# EAGLE board Kord Kontroller PCB 0.1 (EAGLE 9.2.2), part 1 of 2
REV: D
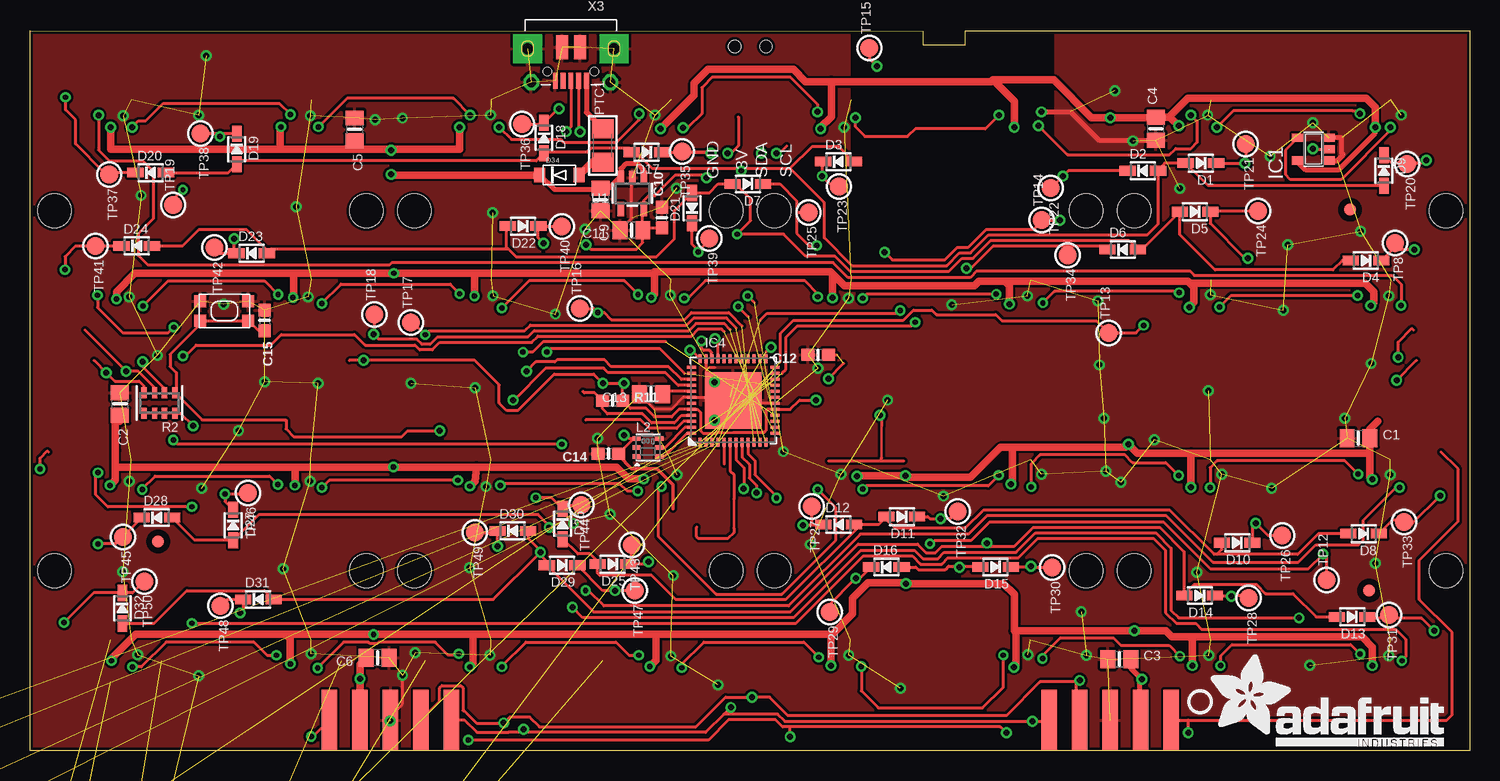
[diagram p0: board, top side]
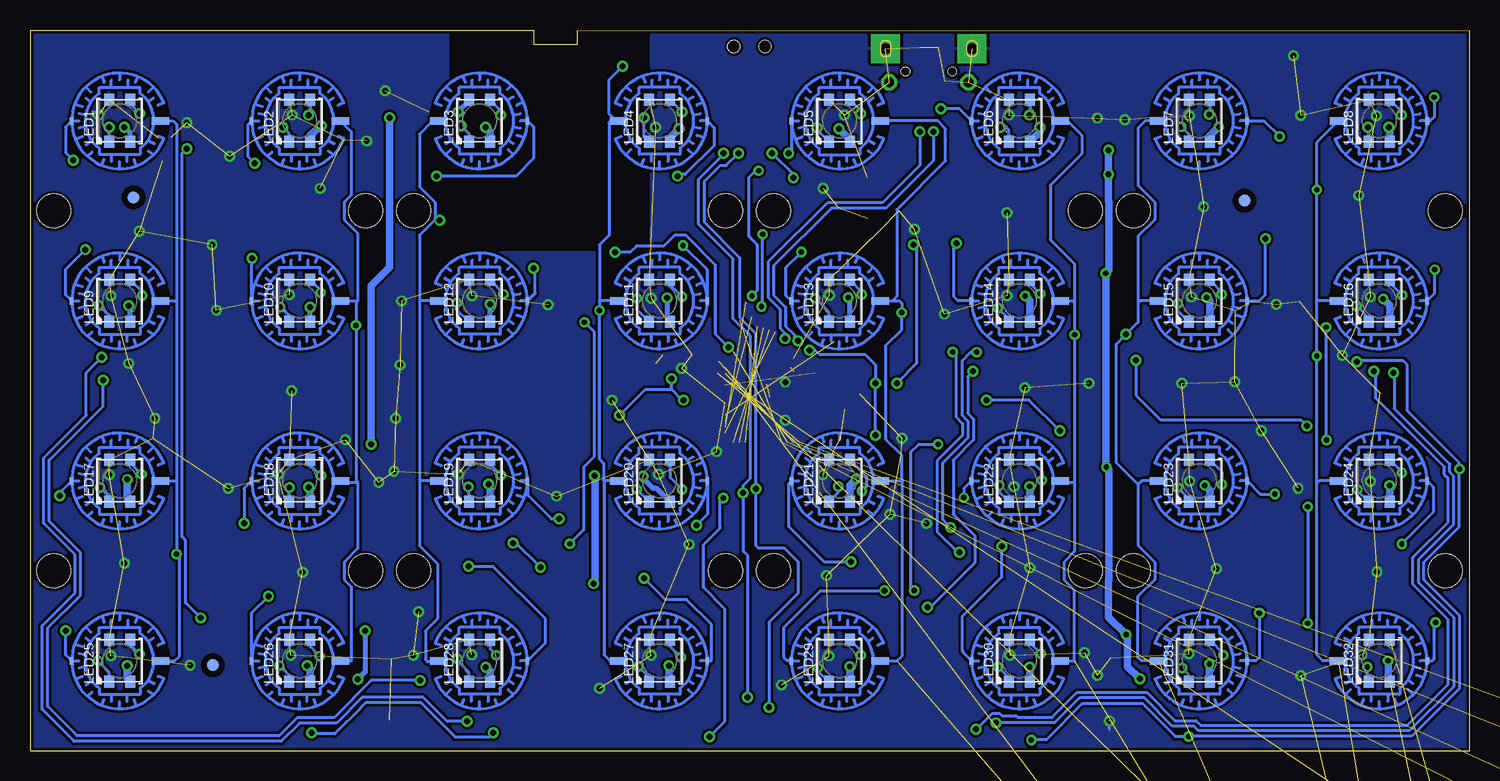
[diagram p1: board, bottom side, seen from below]

Size 120.02 x 60 mm. Coordinates in mm from the lower left corner, seen from the top.
Outline: 120.02,0 0,0 0,60 74.42,59.94 74.42,58.8 77.98,58.8 77.98,60 120.02,60 120.02,0
Copper layers (1*16): Top 0.035mm / dielectric 1.5mm / Bottom 0.035mm
Design rules "adafruit 88 *": minimum track width 8mil, minimum drill 15.5mil, track to track 8mil, track to pad 8mil, pad to pad 8mil, via to via 8mil, smd to smd 8mil, copper to edge 10mil, drill to drill 8mil, minimum pad ring 10mil, minimum via ring 8mil, stop-mask expansion 2mil, vias tented up to drill 20mil, thermal gap 10mil
Net classes: 1 power: width 0.406 mm
Holes 2.8 mm at 118.04,44.97 92.04,44.97 88.04,44.97 62.04,44.97 118.04,14.97 92.04,14.97 88.04,14.97 62.04,14.97 58.04,44.97 32.04,44.97 28.04,44.97 2.04,44.97 58.04,14.97 32.04,14.97 28.04,14.97 2.04,14.97
Holes 1 mm at 61.34,58.67 58.74,58.67
tKeepout: area 0,0 to 6.3,59.9; area 31.7,0 to 38.1,59.9; area 82.5,0 to 88.9,59.9; area 113.7,0 to 120,59.9; area 0,0 to 120,6.3; area 0,53.6 to 31.8,59.9; area 88.2,53.6 to 120,60; area 38,6.3 to 82.5,14.4; area 38.1,34.7 to 82.5,42.3

## Footprints (pad centres in the part's own frame; a part is rotated, then mirrored left to right if it is on the bottom)
0805-NO = smd 1.24 x 1.5: 1 -0.95,0; 2 0.95,0
0603-NO = smd 1.075 x 1: 1 -0.85,0; 2 0.85,0
SOD-323 = smd 1.35 x 0.8: A 1.27,0; C -1.27,0
SOD-123FL = smd 0.91 x 1.22: A 1.637,0; C -1.637,0
FIDUCIAL_1MM = smd 1 x 1: 1 0,0
SOT23-5 = smd 0.69 x 0.99: 1 -0.95,-1.29; 2 0,-1.29; 3 0.95,-1.29; 4 0.95,1.3; 5 -0.95,1.3
TQFN48_7MM = smd 0.25 x 0.75: 1 -2.75,-3.475; 2 -2.25,-3.475; 3 -1.75,-3.475; 4 -1.25,-3.475; 5 -0.75,-3.475; 6 -0.25,-3.475; 7 0.25,-3.475; 8 0.75,-3.475; 9 1.25,-3.475; 10 1.75,-3.475; 11 2.25,-3.475; 12 2.75,-3.475; 25 2.75,3.475; 26 2.25,3.475; 27 1.75,3.475; 28 1.25,3.475; 29 0.75,3.475; 30 0.25,3.475; 31 -0.25,3.475; 32 -0.75,3.475; 33 -1.25,3.475; 34 -1.75,3.475; 35 -2.25,3.475; 36 -2.75,3.475 | smd 0.75 x 0.25: 13 3.475,-2.75; 14 3.475,-2.25; 15 3.475,-1.75; 16 3.475,-1.25; 17 3.475,-0.75; 18 3.475,-0.25; 19 3.475,0.25; 20 3.475,0.75; 21 3.475,1.25; 22 3.475,1.75; 23 3.475,2.25; 24 3.475,2.75; 37 -3.475,2.75; 38 -3.475,2.25; 39 -3.475,1.75; 40 -3.475,1.25; 41 -3.475,0.75; 42 -3.475,0.25; 43 -3.475,-0.25; 44 -3.475,-0.75; 45 -3.475,-1.25; 46 -3.475,-1.75; 47 -3.475,-2.25; 48 -3.475,-2.75 | smd 4.7 x 4.7: THERMAL 0,0
DIN5-RA-PTH = drill 1.4 pad 2.286: 1 7.3,12.5; 2 0,12.5; 3 -7.3,12.5; 4 5,15; 5 -5,15; 6 -5,2.8; 7 5,2.8
5P_EDGECONNECT = smd 1.27 x 5.08: 1 -5.08,0; 2 -2.54,0; 3 0,0; 4 2.54,0; 5 5.08,0
APA102_2020 = smd 0.7 x 0.35: 1 -0.95,-0.75; 2 -0.95,0; 3 -0.95,0.75; 4 0.95,0.75; 5 0.95,0; 6 0.95,-0.75
LED3535 = smd 1 x 0.85: 1 -1.75,0.875; 2 -1.75,-0.875; 3 1.75,-0.875; 4 1.75,0.875
1206 = smd 1.6 x 1.8: 1 -1.4,0; 2 1.4,0
RESPACK_4X0603 = smd 0.45 x 0.9: 1 -1.3,-0.85; 2 -0.4,-0.85; 3 0.4,-0.85; 4 1.3,-0.85; 5 1.3,0.85; 6 0.4,0.85; 7 -0.4,0.85; 8 -1.3,0.85
KMR2 = smd 1 x 1: 1 2,0.8; 2 2,-0.8; 3 -2,0.8; 4 -2,-0.8
TESTPOINT_ROUND_1.5MM = smd 1.5 x 1.5: P$1 0,0
SOT23-5' = smd 0.55 x 1.2: 1 -0.95,-1.3; 2 0,-1.3; 3 0.95,-1.3; 4 0.95,1.3; 5 -0.95,1.3
ELAST_PAD_SQUARE_10MM_4X4WIDE = smd 1.45 x 0.635: P$1 -3.4,0 | smd 0.305 x 0.61: P$2 4,0
4UCONN_20329_NARROW = smd 1 x 2: BASE@1 -0.75,-2; BASE@2 0.75,-2 | smd 0.4 x 1.35: D+ 0,0.775; D- -0.65,0.775; GND 1.3,0.775; ID 0.65,0.775; VBUS -1.3,0.775 | drill 0.8 pad 1.27 octagon: SPRT@1 -3.3,0.9; SPRT@2 3.3,0.9 | drill 0.9 pad 2.413 square: SPRT@3 -3.6,-1.9; SPRT@4 3.6,-1.9 | hole 0.7: -1.95,0; 1.95,0

## Placement (x,y rotation side)
C1  10u  [0805-NO]  110.74,26.04 0 top
C2  10u  [0805-NO]  7.49,28.88 270 top
C3  10u  [0805-NO]  90.81,7.63 0 top
C4  10u  [0805-NO]  93.85,51.82 90 top
C5  10u  [0805-NO]  27.05,51.77 270 top
C6  10u  [0805-NO]  28.98,7.72 180 top
C9  10µF  [0805-NO]  47.56,45.92 270 top
C10  1uF  [0603-NO]  52.67,44.41 90 top
C11  10µF  [0805-NO]  50.13,43.37 180 top
C12  1uF  [0603-NO]  65.7,32.97 180 top
C13  10uF  [0805-NO]  51.78,29.71 180 top
C14  1uF  [0603-NO]  48.21,24.75 180 top
C15  0.1uF  [0603-NO]  19.55,35.84 270 top
D1  1N4148  [SOD-323]  97.61,48.95 180 top
D2  1N4148  [SOD-323]  92.77,48.32 0 top
D3  1N4148  [SOD-323]  67.39,49.07 0 top
D4  1N4148  [SOD-323]  111.37,40.84 180 top
D5  1N4148  [SOD-323]  97.11,44.9 180 top
D6  1N4148  [SOD-323]  91.08,41.75 0 top
D7  1N4148  [SOD-323]  59.84,47.21 180 top
D8  1N4148  [SOD-323]  111.17,18.08 180 top
D9  1N4148  [SOD-323]  112.86,48.33 270 top
D10  1N4148  [SOD-323]  100.63,17.32 180 top
D11  1N4148  [SOD-323]  72.68,19.49 180 top
D12  1N4148  [SOD-323]  67.41,18.83 0 top
D13  1N4148  [SOD-323]  110.21,11.14 180 top
D14  1N4148  [SOD-323]  97.51,12.91 180 top
D15  1N4148  [SOD-323]  80.49,15.3 180 top
D16  1N4148  [SOD-323]  71.39,15.29 0 top
D17  1N4148  [SOD-323]  51.41,49.86 180 top
D18  1N4148  [SOD-323]  42.84,51.05 270 top
D19  1N4148  [SOD-323]  17.23,50.12 270 top
D20  1N4148  [SOD-323]  10.06,48.16 0 top
D21  1N4148  [SOD-323]  55.19,45.2 90 top
D22  1N4148  [SOD-323]  41.1,43.7 180 top
D23  1N4148  [SOD-323]  18.48,41.44 0 top
D24  1N4148  [SOD-323]  8.9,42.06 0 top
D25  1N4148  [SOD-323]  48.57,15.53 180 top
D26  1N4148  [SOD-323]  44.39,18.89 270 top
D27  1N4148  [SOD-323]  16.94,18.8 270 top
D28  1N4148  [SOD-323]  10.57,19.41 0 top
D29  1N4148  [SOD-323]  44.36,15.45 180 top
D30  1N4148  [SOD-323]  40.24,18.31 0 top
D31  1N4148  [SOD-323]  19.03,12.59 0 top
D32  1N4148  [SOD-323]  7.7,11.86 270 top
D33  1N4148  [SOD-323]  -27.9,-20.1 0 top  (outside the outline)
D34  MBR120  [SOD-123FL]  44.13,47.96 0 top
D35  1N4148  [SOD-323]  -23.9,-20.1 0 top  (outside the outline)
D36  1N4148  [SOD-323]  -19.9,-20.1 0 top  (outside the outline)
D37  1N4148  [SOD-323]  -15.9,-20.1 0 top  (outside the outline)
D38  1N4148  [SOD-323]  -27.9,-43.8 0 top  (outside the outline)
D39  1N4148  [SOD-323]  -23.9,-43.8 0 top  (outside the outline)
D40  1N4148  [SOD-323]  -19.9,-43.8 0 top  (outside the outline)
D41  1N4148  [SOD-323]  -15.9,-43.8 0 top  (outside the outline)
D42  1N4148  [SOD-323]  -27.9,-69.8 0 top  (outside the outline)
D43  1N4148  [SOD-323]  -23.9,-69.8 0 top  (outside the outline)
D44  1N4148  [SOD-323]  -19.9,-69.8 0 top  (outside the outline)
D45  1N4148  [SOD-323]  -15.9,-69.8 0 top  (outside the outline)
D46  1N4148  [SOD-323]  -27.9,-104.2 0 top  (outside the outline)
D47  1N4148  [SOD-323]  -23.9,-104.2 0 top  (outside the outline)
D48  1N4148  [SOD-323]  -19.9,-104.2 0 top  (outside the outline)
D49  1N4148  [SOD-323]  -15.9,-104.2 0 top  (outside the outline)
D50  1N4148  [SOD-323]  -11.9,-104.2 0 top  (outside the outline)
D51  1N4148  [SOD-323]  -7.9,-104.2 0 top  (outside the outline)
D52  1N4148  [SOD-323]  -3.9,-104.2 0 top  (outside the outline)
D53  1N4148  [SOD-323]  0.1,-104.2 0 top  (outside the outline)
D54  1N4148  [SOD-323]  -27.9,-108.7 0 top  (outside the outline)
D55  1N4148  [SOD-323]  -23.9,-108.7 0 top  (outside the outline)
D56  1N4148  [SOD-323]  -19.9,-108.7 0 top  (outside the outline)
D57  1N4148  [SOD-323]  -15.9,-108.7 0 top  (outside the outline)
FID1  FIDUCIAL_1MM  [FIDUCIAL_1MM]  10.68,17.43 0 top
FID2  FIDUCIAL_1MM  [FIDUCIAL_1MM]  111.63,13.34 0 top
FID3  FIDUCIAL_1MM  [FIDUCIAL_1MM]  110.04,45.08 0 top
FID4  FIDUCIAL_1MM  [FIDUCIAL_1MM]  111.38,46.1 0 bottom
FID5  FIDUCIAL_1MM  [FIDUCIAL_1MM]  104.78,7.11 0 bottom
FID6  FIDUCIAL_1MM  [FIDUCIAL_1MM]  18.77,45.82 0 bottom
IC1  74HCT1G125DBV  [SOT23-5]  107,50.11 90 top
IC4  ATSAMD51G_TQFN48  [TQFN48_7MM]  58.62,29.17 0 top
J1  DIN5  [DIN5-RA-PTH]  -19.3,4.4 0 top  (outside the outline)
JP3  [5P_EDGECONNECT]  30.04,2.54 0 top
JP4  [5P_EDGECONNECT]  90.04,2.54 180 top
L2  AP102-2020  [APA102_2020]  51.51,25.25 0 top
LED1  WS2812B3535  [LED3535]  112.54,52.47 90 bottom
LED2  WS2812B3535  [LED3535]  97.54,52.47 90 bottom
LED3  WS2812B3535  [LED3535]  82.54,52.47 90 bottom
LED4  WS2812B3535  [LED3535]  67.54,52.47 90 bottom
LED5  WS2812B3535  [LED3535]  52.54,52.47 90 bottom
LED6  WS2812B3535  [LED3535]  37.54,52.47 90 bottom
LED7  WS2812B3535  [LED3535]  22.54,52.47 90 bottom
LED8  WS2812B3535  [LED3535]  7.54,52.47 90 bottom
LED9  WS2812B3535  [LED3535]  112.54,37.47 90 bottom
LED10  WS2812B3535  [LED3535]  97.54,37.47 90 bottom
LED11  WS2812B3535  [LED3535]  67.54,37.47 90 bottom
LED12  WS2812B3535  [LED3535]  82.54,37.47 90 bottom
LED13  WS2812B3535  [LED3535]  52.54,37.47 90 bottom
LED14  WS2812B3535  [LED3535]  37.54,37.47 90 bottom
LED15  WS2812B3535  [LED3535]  22.54,37.47 90 bottom
LED16  WS2812B3535  [LED3535]  7.54,37.47 90 bottom
LED17  WS2812B3535  [LED3535]  112.54,22.47 90 bottom
LED18  WS2812B3535  [LED3535]  97.54,22.48 90 bottom
LED19  WS2812B3535  [LED3535]  82.55,22.48 90 bottom
LED20  WS2812B3535  [LED3535]  67.54,22.47 90 bottom
LED21  WS2812B3535  [LED3535]  52.54,22.47 90 bottom
LED22  WS2812B3535  [LED3535]  37.53,22.47 90 bottom
LED23  WS2812B3535  [LED3535]  22.54,22.47 90 bottom
LED24  WS2812B3535  [LED3535]  7.54,22.47 90 bottom
LED25  WS2812B3535  [LED3535]  112.54,7.48 90 bottom
LED26  WS2812B3535  [LED3535]  97.55,7.47 90 bottom
LED27  WS2812B3535  [LED3535]  67.54,7.47 90 bottom
LED28  WS2812B3535  [LED3535]  82.54,7.47 90 bottom
LED29  WS2812B3535  [LED3535]  52.55,7.47 90 bottom
LED30  WS2812B3535  [LED3535]  37.53,7.47 90 bottom
LED31  WS2812B3535  [LED3535]  22.55,7.47 90 bottom
LED32  WS2812B3535  [LED3535]  7.54,7.48 90 bottom
LED33  WS2812B3535  [LED3535]  -27.4,-119 0 top  (outside the outline)
LED34  WS2812B3535  [LED3535]  -22.6,-119 0 top  (outside the outline)
LED35  WS2812B3535  [LED3535]  -17.8,-119 0 top  (outside the outline)
LED36  WS2812B3535  [LED3535]  -27.4,-125.4 0 top  (outside the outline)
LED37  WS2812B3535  [LED3535]  -22.6,-125.4 0 top  (outside the outline)
LED38  WS2812B3535  [LED3535]  -17.8,-125.4 0 top  (outside the outline)
LED39  WS2812B3535  [LED3535]  -27.4,-131.8 0 top  (outside the outline)
LED40  WS2812B3535  [LED3535]  -22.6,-131.8 0 top  (outside the outline)
LED41  WS2812B3535  [LED3535]  -27.4,-138.2 0 top  (outside the outline)
LED42  WS2812B3535  [LED3535]  -22.6,-138.2 0 top  (outside the outline)
LED43  WS2812B3535  [LED3535]  -17.8,-138.2 0 top  (outside the outline)
LED44  WS2812B3535  [LED3535]  -27.4,-144.6 0 top  (outside the outline)
LED45  WS2812B3535  [LED3535]  -22.6,-144.6 0 top  (outside the outline)
LED46  WS2812B3535  [LED3535]  -17.8,-144.6 0 top  (outside the outline)
LED47  WS2812B3535  [LED3535]  -27.4,-151 0 top  (outside the outline)
LED48  WS2812B3535  [LED3535]  -22.6,-151 0 top  (outside the outline)
LED49  WS2812B3535  [LED3535]  -27.4,-157.4 0 top  (outside the outline)
LED50  WS2812B3535  [LED3535]  -22.6,-157.4 0 top  (outside the outline)
LED51  WS2812B3535  [LED3535]  -17.8,-157.4 0 top  (outside the outline)
LED52  WS2812B3535  [LED3535]  -27.4,-163.8 0 top  (outside the outline)
LED53  WS2812B3535  [LED3535]  -22.6,-163.8 0 top  (outside the outline)
LED54  WS2812B3535  [LED3535]  -17.8,-163.8 0 top  (outside the outline)
LED55  WS2812B3535  [LED3535]  -27.4,-170.2 0 top  (outside the outline)
LED56  WS2812B3535  [LED3535]  -22.6,-170.2 0 top  (outside the outline)
PTC1  500mA Fuse  [1206]  47.75,50.42 90 top
R2  10K  [RESPACK_4X0603]  10.79,28.96 180 top
R11  10K  [0603-NO]  48.56,29.16 0 top
SW1  SPST_TACT-KMR2  [KMR2]  16.21,36.63 180 top
TP5  [TESTPOINT_ROUND_1.5MM]  -28.8,-23.6 0 top  (outside the outline)
TP6  [TESTPOINT_ROUND_1.5MM]  -24.1,-23.6 0 top  (outside the outline)
TP7  [TESTPOINT_ROUND_1.5MM]  -19.4,-23.6 0 top  (outside the outline)
TP8  [TESTPOINT_ROUND_1.5MM]  113.79,42.29 270 top
TP9  [TESTPOINT_ROUND_1.5MM]  -14.7,-23.6 0 top  (outside the outline)
TP10  [TESTPOINT_ROUND_1.5MM]  -28.8,-47.3 0 top  (outside the outline)
TP11  [TESTPOINT_ROUND_1.5MM]  -28.8,-49.6 0 top  (outside the outline)
TP12  [TESTPOINT_ROUND_1.5MM]  108.08,14.22 90 top
TP13  [TESTPOINT_ROUND_1.5MM]  89.92,34.8 90 top
TP14  [TESTPOINT_ROUND_1.5MM]  84.33,44.2 90 top
TP15  [TESTPOINT_ROUND_1.5MM]  69.98,58.55 90 top
TP16  [TESTPOINT_ROUND_1.5MM]  45.85,36.83 90 top
TP17  [TESTPOINT_ROUND_1.5MM]  31.75,35.69 90 top
TP18  [TESTPOINT_ROUND_1.5MM]  28.7,36.32 90 top
TP19  [TESTPOINT_ROUND_1.5MM]  11.94,45.47 90 top
TP20  [TESTPOINT_ROUND_1.5MM]  114.81,48.9 270 top
TP21  [TESTPOINT_ROUND_1.5MM]  101.35,50.55 270 top
TP22  [TESTPOINT_ROUND_1.5MM]  85.09,46.86 270 top
TP23  [TESTPOINT_ROUND_1.5MM]  67.44,46.99 270 top
TP24  [TESTPOINT_ROUND_1.5MM]  102.36,44.96 270 top
TP25  [TESTPOINT_ROUND_1.5MM]  64.9,44.83 270 top
TP26  [TESTPOINT_ROUND_1.5MM]  104.39,17.91 270 top
TP27  [TESTPOINT_ROUND_1.5MM]  65.15,20.32 270 top
TP28  [TESTPOINT_ROUND_1.5MM]  101.6,12.7 270 top
TP29  [TESTPOINT_ROUND_1.5MM]  66.67,11.56 270 top
TP30  [TESTPOINT_ROUND_1.5MM]  85.22,15.24 270 top
TP31  [TESTPOINT_ROUND_1.5MM]  113.28,11.3 270 top
TP32  [TESTPOINT_ROUND_1.5MM]  77.34,19.94 270 top
TP33  [TESTPOINT_ROUND_1.5MM]  114.55,19.05 270 top
TP34  [TESTPOINT_ROUND_1.5MM]  86.49,41.27 270 top
TP35  [TESTPOINT_ROUND_1.5MM]  54.36,49.91 270 top
TP36  [TESTPOINT_ROUND_1.5MM]  41.02,52.2 270 top
TP37  [TESTPOINT_ROUND_1.5MM]  6.6,48.01 270 top
TP38  [TESTPOINT_ROUND_1.5MM]  14.22,51.44 270 top
TP39  [TESTPOINT_ROUND_1.5MM]  56.64,42.67 270 top
TP40  [TESTPOINT_ROUND_1.5MM]  44.32,43.69 270 top
TP41  [TESTPOINT_ROUND_1.5MM]  5.46,42.04 270 top
TP42  [TESTPOINT_ROUND_1.5MM]  15.37,41.91 270 top
TP43  [TESTPOINT_ROUND_1.5MM]  50.16,17.14 270 top
TP44  [TESTPOINT_ROUND_1.5MM]  45.97,20.45 270 top
TP45  [TESTPOINT_ROUND_1.5MM]  7.75,17.78 270 top
TP46  [TESTPOINT_ROUND_1.5MM]  18.16,21.46 270 top
TP47  [TESTPOINT_ROUND_1.5MM]  50.42,13.34 270 top
TP48  [TESTPOINT_ROUND_1.5MM]  15.88,12.06 270 top
TP49  [TESTPOINT_ROUND_1.5MM]  37.08,18.16 270 top
TP50  [TESTPOINT_ROUND_1.5MM]  9.53,14.1 270 top
TP51  [TESTPOINT_ROUND_1.5MM]  -23.4,-47.3 0 top  (outside the outline)
TP52  [TESTPOINT_ROUND_1.5MM]  -18,-47.3 0 top  (outside the outline)
TP53  [TESTPOINT_ROUND_1.5MM]  -28.8,-73.3 0 top  (outside the outline)
TP54  [TESTPOINT_ROUND_1.5MM]  -23.4,-73.3 0 top  (outside the outline)
TP55  [TESTPOINT_ROUND_1.5MM]  -18,-73.3 0 top  (outside the outline)
TP56  [TESTPOINT_ROUND_1.5MM]  -28.8,-75.6 0 top  (outside the outline)
TP57  [TESTPOINT_ROUND_1.5MM]  -12.8,-107.7 0 top  (outside the outline)
TP58  [TESTPOINT_ROUND_1.5MM]  -7.4,-107.7 0 top  (outside the outline)
TP59  [TESTPOINT_ROUND_1.5MM]  -2,-107.7 0 top  (outside the outline)
TP60  [TESTPOINT_ROUND_1.5MM]  -28.8,-112.2 0 top  (outside the outline)
TP61  [TESTPOINT_ROUND_1.5MM]  -23.4,-112.2 0 top  (outside the outline)
TP62  [TESTPOINT_ROUND_1.5MM]  -18,-112.2 0 top  (outside the outline)
TP63  [TESTPOINT_ROUND_1.5MM]  -12.6,-112.2 0 top  (outside the outline)
TP64  [TESTPOINT_ROUND_1.5MM]  -7.2,-112.2 0 top  (outside the outline)
TP65  [TESTPOINT_ROUND_1.5MM]  -1.8,-112.2 0 top  (outside the outline)
TP66  [TESTPOINT_ROUND_1.5MM]  -28.8,-114.5 0 top  (outside the outline)
TP67  [TESTPOINT_ROUND_1.5MM]  -23.4,-114.5 0 top  (outside the outline)
TP68  [TESTPOINT_ROUND_1.5MM]  -18,-114.5 0 top  (outside the outline)
U1  AP2112K-3.3  [SOT23-5']  50.22,46.43 180 top
U$1  ELAST_10X10  [ELAST_PAD_SQUARE_10MM_4X4WIDE]  -25.7,-5.3 0 top  (outside the outline)
U$2  ELAST_10X10  [ELAST_PAD_SQUARE_10MM_4X4WIDE]  -17.2,-5.3 0 top  (outside the outline)
U$3  [ADAFRUIT_TEXT_20MM]  98.3,0.38 0 top
U$4  ELAST_10X10  [ELAST_PAD_SQUARE_10MM_4X4WIDE]  112.54,52.47 180 bottom
U$5  ELAST_10X10  [ELAST_PAD_SQUARE_10MM_4X4WIDE]  97.54,52.47 180 bottom
U$6  ELAST_10X10  [ELAST_PAD_SQUARE_10MM_4X4WIDE]  82.54,52.47 0 bottom
U$7  ELAST_10X10  [ELAST_PAD_SQUARE_10MM_4X4WIDE]  67.54,52.47 0 bottom
U$8  ELAST_10X10  [ELAST_PAD_SQUARE_10MM_4X4WIDE]  112.54,37.47 180 bottom
U$9  ELAST_10X10  [ELAST_PAD_SQUARE_10MM_4X4WIDE]  97.54,37.47 180 bottom
U$10  ELAST_10X10  [ELAST_PAD_SQUARE_10MM_4X4WIDE]  82.54,37.47 0 bottom
U$11  ELAST_10X10  [ELAST_PAD_SQUARE_10MM_4X4WIDE]  67.54,37.47 0 bottom
U$12  ELAST_10X10  [ELAST_PAD_SQUARE_10MM_4X4WIDE]  112.54,22.47 180 bottom
U$14  ELAST_10X10  [ELAST_PAD_SQUARE_10MM_4X4WIDE]  -25.7,-13.7 0 top  (outside the outline)
U$19  ELAST_10X10  [ELAST_PAD_SQUARE_10MM_4X4WIDE]  52.54,52.47 180 bottom
U$20  ELAST_10X10  [ELAST_PAD_SQUARE_10MM_4X4WIDE]  -17.2,-13.7 0 top  (outside the outline)
U$23  ELAST_10X10  [ELAST_PAD_SQUARE_10MM_4X4WIDE]  97.54,22.47 180 bottom
U$24  ELAST_10X10  [ELAST_PAD_SQUARE_10MM_4X4WIDE]  67.54,22.47 0 bottom
U$25  ELAST_10X10  [ELAST_PAD_SQUARE_10MM_4X4WIDE]  82.54,22.47 0 bottom
U$26  ELAST_10X10  [ELAST_PAD_SQUARE_10MM_4X4WIDE]  112.54,7.47 180 bottom
U$27  ELAST_10X10  [ELAST_PAD_SQUARE_10MM_4X4WIDE]  97.54,7.47 180 bottom
U$28  ELAST_10X10  [ELAST_PAD_SQUARE_10MM_4X4WIDE]  82.54,7.47 0 bottom
U$29  ELAST_10X10  [ELAST_PAD_SQUARE_10MM_4X4WIDE]  67.54,7.47 0 bottom
U$30  ELAST_10X10  [ELAST_PAD_SQUARE_10MM_4X4WIDE]  -25.7,-29 0 top  (outside the outline)
U$31  ELAST_10X10  [ELAST_PAD_SQUARE_10MM_4X4WIDE]  -17.2,-29 0 top  (outside the outline)
U$32  ELAST_10X10  [ELAST_PAD_SQUARE_10MM_4X4WIDE]  -25.7,-37.4 0 top  (outside the outline)
U$33  ELAST_10X10  [ELAST_PAD_SQUARE_10MM_4X4WIDE]  37.54,52.47 180 bottom
U$34  ELAST_10X10  [ELAST_PAD_SQUARE_10MM_4X4WIDE]  22.55,52.47 0 bottom
U$35  ELAST_10X10  [ELAST_PAD_SQUARE_10MM_4X4WIDE]  7.54,52.48 0 bottom
U$36  ELAST_10X10  [ELAST_PAD_SQUARE_10MM_4X4WIDE]  52.54,37.47 180 bottom
U$37  ELAST_10X10  [ELAST_PAD_SQUARE_10MM_4X4WIDE]  37.54,37.47 180 bottom
U$38  ELAST_10X10  [ELAST_PAD_SQUARE_10MM_4X4WIDE]  22.55,37.47 0 bottom
U$39  ELAST_10X10  [ELAST_PAD_SQUARE_10MM_4X4WIDE]  7.55,37.47 0 bottom
U$40  ELAST_10X10  [ELAST_PAD_SQUARE_10MM_4X4WIDE]  52.54,22.48 180 bottom
U$41  ELAST_10X10  [ELAST_PAD_SQUARE_10MM_4X4WIDE]  37.54,22.47 180 bottom
U$42  ELAST_10X10  [ELAST_PAD_SQUARE_10MM_4X4WIDE]  7.55,22.47 0 bottom
U$43  ELAST_10X10  [ELAST_PAD_SQUARE_10MM_4X4WIDE]  22.55,22.47 0 bottom
U$44  ELAST_10X10  [ELAST_PAD_SQUARE_10MM_4X4WIDE]  52.55,7.47 180 bottom
U$45  ELAST_10X10  [ELAST_PAD_SQUARE_10MM_4X4WIDE]  37.54,7.47 180 bottom
U$46  ELAST_10X10  [ELAST_PAD_SQUARE_10MM_4X4WIDE]  22.55,7.47 0 bottom
U$47  ELAST_10X10  [ELAST_PAD_SQUARE_10MM_4X4WIDE]  7.54,7.48 0 bottom
U$48  [TRELLISLOGO]  39.24,0 0 top
U$49  ELAST_10X10  [ELAST_PAD_SQUARE_10MM_4X4WIDE]  -17.2,-37.4 0 top  (outside the outline)
U$54  ELAST_10X10  [ELAST_PAD_SQUARE_10MM_4X4WIDE]  -25.7,-55 0 top  (outside the outline)
U$58  ELAST_10X10  [ELAST_PAD_SQUARE_10MM_4X4WIDE]  -17.2,-55 0 top  (outside the outline)
U$59  ELAST_10X10  [ELAST_PAD_SQUARE_10MM_4X4WIDE]  -25.7,-63.4 0 top  (outside the outline)
U$61  ELAST_10X10  [ELAST_PAD_SQUARE_10MM_4X4WIDE]  -17.2,-63.4 0 top  (outside the outline)
U$67  ELAST_10X10  [ELAST_PAD_SQUARE_10MM_4X4WIDE]  -25.7,-81 0 top  (outside the outline)
U$68  ELAST_10X10  [ELAST_PAD_SQUARE_10MM_4X4WIDE]  -17.2,-81 0 top  (outside the outline)
U$69  ELAST_10X10  [ELAST_PAD_SQUARE_10MM_4X4WIDE]  -8.7,-81 0 top  (outside the outline)
U$70  ELAST_10X10  [ELAST_PAD_SQUARE_10MM_4X4WIDE]  -0.2,-81 0 top  (outside the outline)
U$71  ELAST_10X10  [ELAST_PAD_SQUARE_10MM_4X4WIDE]  -25.7,-89.4 0 top  (outside the outline)
U$72  ELAST_10X10  [ELAST_PAD_SQUARE_10MM_4X4WIDE]  -17.2,-89.4 0 top  (outside the outline)
U$73  ELAST_10X10  [ELAST_PAD_SQUARE_10MM_4X4WIDE]  -8.7,-89.4 0 top  (outside the outline)
U$74  ELAST_10X10  [ELAST_PAD_SQUARE_10MM_4X4WIDE]  -0.2,-89.4 0 top  (outside the outline)
U$75  ELAST_10X10  [ELAST_PAD_SQUARE_10MM_4X4WIDE]  -25.7,-97.8 0 top  (outside the outline)
U$76  ELAST_10X10  [ELAST_PAD_SQUARE_10MM_4X4WIDE]  -17.2,-97.8 0 top  (outside the outline)
U$77  ELAST_10X10  [ELAST_PAD_SQUARE_10MM_4X4WIDE]  -8.7,-97.8 0 top  (outside the outline)
U$78  [PCBFEAT-REV-040]  97.54,4.06 0 top
U$80  ELAST_10X10  [ELAST_PAD_SQUARE_10MM_4X4WIDE]  -0.2,-97.8 0 top  (outside the outline)
X3  microUSB  [4UCONN_20329_NARROW]  45.09,56.59 180 top

## Library data of the parts
C1-C6 C9 C10 C12-C15 D1-D33 D35-D57 IC4 JP3 JP4 L2 LED1-LED56 PTC1 R2 R11 TP5-TP68 U1 U$1-U$12 U$14 U$19 U$20 U$23-U$47 U$49 U$54 U$58 U$59 U$61 U$67-U$78 U$80 X3 = microbuilder
C11 = microbuilder; COMPANY: ADAFRUIT INDUSTRIES; DRAWN: KTOWN; REV: A
D34 SW1 = adafruit
FID1-FID6 = microbuilder; BOM: EXCLUDE
IC1 = 74xx-little-us
J1 = SparkFun-Connectors; PROD_ID: CONN-09481
U$48 = silks

## Nets
3.3V: C10.1 C11.1 C12.1 C14.1 IC4.17 IC4.36 IC4.44 L2.3 R2.5 R2.6 R2.7 R2.8 R11.2 U1.5
!RESET: C15.2 IC4.40 R2.1 SW1.1 SW1.3
AVDD: IC4.6
COL0: IC4.1 TP12.P$1 U$1.P$1 U$4.P$1 U$8.P$1 U$12.P$1 U$26.P$1 U$30.P$1 U$54.P$1
COL1: IC4.2 TP13.P$1 U$2.P$1 U$5.P$1 U$9.P$1 U$23.P$1 U$27.P$1 U$31.P$1 U$58.P$1
COL2: IC4.3 TP14.P$1 U$6.P$1 U$10.P$1 U$14.P$1 U$25.P$1 U$28.P$1 U$32.P$1 U$59.P$1
COL3: IC4.4 TP15.P$1 U$7.P$1 U$11.P$1 U$20.P$1 U$24.P$1 U$29.P$1 U$49.P$1 U$61.P$1
COL4: IC4.10 TP16.P$1 U$19.P$1 U$36.P$1 U$40.P$1 U$44.P$1 U$67.P$1 U$71.P$1 U$75.P$1
COL5: IC4.11 TP17.P$1 U$33.P$1 U$37.P$1 U$41.P$1 U$45.P$1 U$68.P$1 U$72.P$1 U$76.P$1
COL6: IC4.12 TP18.P$1 U$34.P$1 U$38.P$1 U$43.P$1 U$46.P$1 U$69.P$1 U$73.P$1 U$77.P$1
COL7: IC4.13 TP19.P$1 U$35.P$1 U$39.P$1 U$42.P$1 U$47.P$1 U$70.P$1 U$74.P$1 U$80.P$1
D+: IC4.34 X3.D+
D-: IC4.33 X3.D-
DOTSTAR_CLK: IC4.47 L2.5
DOTSTAR_DATA: IC4.48 L2.6
GND: C1.1 C2.1 C3.1 C4.1 C5.1 C6.1 C9.2 C10.2 C11.2 C12.2 C13.2 C14.2 C15.1 IC1.1 IC1.3 IC4.18 IC4.35 IC4.42 IC4.THERMAL JP3.3 JP4.3 L2.4 LED1.4 LED2.4 LED3.4 LED4.4 LED5.4 LED6.4 LED7.4 LED8.4 LED9.4 LED10.4 LED11.4 LED12.4 LED13.4 LED14.4 LED15.4 LED16.4 LED17.4 LED18.4 LED19.4 LED20.4 LED21.4 LED22.4 LED23.4 LED24.4 LED25.4 LED26.4 LED27.4 LED28.4 LED29.4 LED30.4 LED31.4 LED32.4 LED33.4 LED34.4 LED35.4 LED36.4 LED37.4 LED38.4 LED39.4 LED40.4 LED41.4 LED42.4 LED43.4 LED44.4 LED45.4 LED46.4 LED47.4 LED48.4 LED49.4 LED50.4 LED51.4 LED52.4 LED53.4 LED54.4 LED55.4 LED56.4 SW1.2 SW1.4 U1.2 X3.BASE@1 X3.BASE@2 X3.GND X3.SPRT@1 X3.SPRT@2 X3.SPRT@3 X3.SPRT@4
INT: IC4.9 JP3.1 JP4.1 R2.2
N$1: D33.C TP9.P$1 U$1.P$2
N$2: D9.C TP20.P$1 U$4.P$2
N$3: D1.C TP21.P$1 U$5.P$2
N$4: D2.C TP22.P$1 U$6.P$2
N$5: D3.C TP23.P$1 U$7.P$2
N$6: D4.C TP8.P$1 U$8.P$2
N$7: LED17.3 LED18.1
N$8: LED18.3 LED19.1
N$9: D5.C TP24.P$1 U$9.P$2
N$10: LED19.3 LED20.1
N$11: LED1.3 LED2.1
N$12: LED2.3 LED3.1
N$13: LED3.3 LED4.1
N$14: LED4.3 LED5.1
N$15: D6.C TP34.P$1 U$10.P$2
N$16: LED5.3 LED6.1
N$17: LED6.3 LED7.1
N$18: D7.C TP25.P$1 U$11.P$2
N$19: LED7.3 LED8.1
N$20: D8.C TP33.P$1 U$12.P$2
N$21: LED8.3 LED9.1
N$22: D10.C TP26.P$1 U$23.P$2
N$23: D11.C TP32.P$1 U$25.P$2
N$24: D12.C TP27.P$1 U$24.P$2
N$25: D13.C TP31.P$1 U$26.P$2
N$26: D14.C TP28.P$1 U$27.P$2
N$27: D15.C TP30.P$1 U$28.P$2
N$28: D16.C TP29.P$1 U$29.P$2
N$29: LED9.3 LED10.1
N$30: LED10.3 LED12.1
N$31: LED11.1 LED12.3
N$32: LED11.3 LED13.1
N$33: LED13.3 LED14.1
N$34: LED14.3 LED15.1
N$35: LED15.3 LED16.1
N$36: LED20.3 LED21.1
N$37: LED21.3 LED22.1
N$38: LED22.3 LED23.1
N$39: LED23.3 LED24.1
N$40: LED24.3 LED25.1
N$41: LED25.3 LED26.1
N$42: LED26.3 LED28.1
N$43: LED27.1 LED28.3
N$44: LED27.3 LED29.1
N$45: LED29.3 LED30.1
N$46: LED30.3 LED31.1
N$47: LED31.3 LED32.1
N$48: D17.C TP35.P$1 U$19.P$2
N$49: D18.C TP36.P$1 U$33.P$2
N$50: D19.C TP38.P$1 U$34.P$2
N$51: D20.C TP37.P$1 U$35.P$2
N$52: D21.C TP39.P$1 U$36.P$2
N$53: D22.C TP40.P$1 U$37.P$2
N$54: D23.C TP42.P$1 U$38.P$2
N$55: D24.C TP41.P$1 U$39.P$2
N$56: D25.C TP43.P$1 U$40.P$2
N$57: D26.C TP44.P$1 U$41.P$2
N$58: D27.C TP46.P$1 U$43.P$2
N$59: D28.C TP45.P$1 U$42.P$2
N$60: D29.C TP47.P$1 U$44.P$2
N$61: D30.C TP49.P$1 U$45.P$2
N$62: D31.C TP48.P$1 U$46.P$2
N$63: D32.C TP50.P$1 U$47.P$2
N$64: LED16.3 LED17.1
N$65: D35.C TP5.P$1 U$2.P$2
N$66: PTC1.2 X3.VBUS
N$67: D36.C TP7.P$1 U$14.P$2
N$68: D37.C TP6.P$1 U$20.P$2
N$69: D38.C TP52.P$1 U$30.P$2
N$70: D39.C TP10.P$1 U$31.P$2
N$71: D40.C TP51.P$1 U$32.P$2
N$72: D41.C TP11.P$1 U$49.P$2
N$73: D42.C TP56.P$1 U$54.P$2
N$74: D43.C TP53.P$1 U$58.P$2
N$75: D44.C TP55.P$1 U$59.P$2
N$76: D45.C TP54.P$1 U$61.P$2
N$77: D46.C TP60.P$1 U$67.P$2
N$78: D47.C TP57.P$1 U$68.P$2
N$79: D48.C TP59.P$1 U$69.P$2
N$80: D49.C TP58.P$1 U$70.P$2
N$81: D50.C TP64.P$1 U$71.P$2
N$82: D51.C TP61.P$1 U$72.P$2
N$83: D52.C TP63.P$1 U$73.P$2
N$84: D53.C TP62.P$1 U$74.P$2
N$85: D54.C TP68.P$1 U$75.P$2
N$86: D55.C TP65.P$1 U$76.P$2
N$87: D56.C TP67.P$1 U$77.P$2
N$88: D57.C TP66.P$1 U$80.P$2
N$89: LED33.3 LED34.1
N$90: LED34.3 LED36.1
N$91: LED35.1 LED36.3
N$92: LED35.3 LED37.1
N$93: LED37.3 LED38.1
N$94: LED38.3 LED39.1
N$95: LED39.3 LED40.1
N$96: LED41.3 LED42.1
N$97: LED42.3 LED44.1
N$98: LED43.1 LED44.3
N$99: LED43.3 LED45.1
N$100: LED45.3 LED46.1
N$101: LED46.3 LED47.1
N$102: LED47.3 LED48.1
N$103: LED49.3 LED50.1
N$104: LED50.3 LED52.1
N$105: LED51.1 LED52.3
N$106: LED51.3 LED53.1
N$107: LED53.3 LED54.1
N$108: LED54.3 LED55.1
N$109: LED55.3 LED56.1
N$111: LED40.3 LED41.1
N$112: LED48.3 LED49.1
N$113: LED32.3 LED33.1
NEOPIXEL_3V: IC1.2 IC4.39
NEOPIXEL_5V: IC1.4 LED1.1
ROW0: D1.A D2.A D3.A D9.A D17.A D18.A D19.A D20.A IC4.14
ROW1: D4.A D5.A D6.A D7.A D21.A D22.A D23.A D24.A IC4.15
ROW2: D8.A D10.A D11.A D12.A D25.A D26.A D27.A D28.A IC4.16
ROW3: D13.A D14.A D15.A D16.A D29.A D30.A D31.A D32.A IC4.21
ROW4: D33.A D35.A D36.A D37.A D46.A D47.A D48.A D49.A IC4.22
ROW5: D38.A D39.A D40.A D41.A D50.A D51.A D52.A D53.A IC4.23
ROW6: D42.A D43.A D44.A D45.A D54.A D55.A D56.A D57.A IC4.24
SCL: IC4.8 JP3.4 JP4.4 R2.4
SDA: IC4.7 JP3.5 JP4.5 R2.3
SWCLK: IC4.45 R11.1
SWDIO: IC4.46
VBUS: D34.A PTC1.1
VDD [power]: C1.2 C2.2 C3.2 C4.2 C5.2 C6.2 C9.1 D34.C IC1.5 JP3.2 JP4.2 LED1.2 LED2.2 LED3.2 LED4.2 LED5.2 LED6.2 LED7.2 LED8.2 LED9.2 LED10.2 LED11.2 LED12.2 LED13.2 LED14.2 LED15.2 LED16.2 LED17.2 LED18.2 LED19.2 LED20.2 LED21.2 LED22.2 LED23.2 LED24.2 LED25.2 LED26.2 LED27.2 LED28.2 LED29.2 LED30.2 LED31.2 LED32.2 LED33.2 LED34.2 LED35.2 LED36.2 LED37.2 LED38.2 LED39.2 LED40.2 LED41.2 LED42.2 LED43.2 LED44.2 LED45.2 LED46.2 LED47.2 LED48.2 LED49.2 LED50.2 LED51.2 LED52.2 LED53.2 LED54.2 LED55.2 LED56.2 U1.1 U1.3
VDDCORE: C13.1 IC4.41
VSS: IC4.5
VSW: IC4.43